# Altium PCB power-v2.2.PcbDoc (part 2 of 2)
Units mil, origin at the board's own origin, x right, y up, seen from the top; angles counter-clockwise.
Board outline 6000 x 4000 mil, 2 copper layers (Top Layer, Bottom Layer); 125 components, 68 nets, 351 pads, 6 vias.
Unrouted connection lines stored in the file: 252.
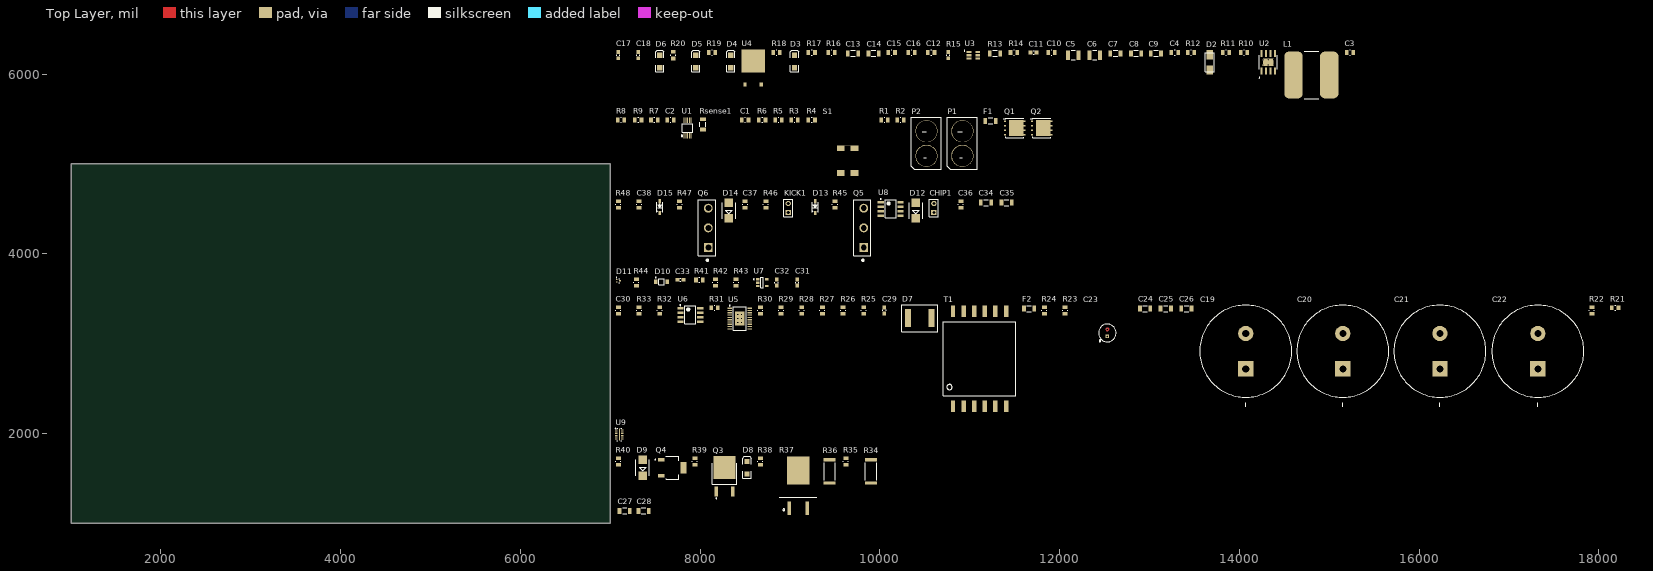
[diagram p0: Top Layer view]

## Part data (continued)
U5: "Controller to 20-Pin TSSOP EP", Case/Package=TSSOP, Manufacturer="Analog Devices / Linear Technology", Max Input Voltage=24V, Max Operating Temperature=125°C, Min Operating Temperature=-40°C, Min Supply Voltage=4.75V, Operating Supply Current=5.5mA, Output Current=150mA, Output Voltage=500V, Package Quantity=74, Category="Voltage Regulators - Switching", ComponentLink1Description=https://datasheet.ciiva.com/15104/getdatasheetpartid-472813-15104438.pdf?src-supplier=Verical, ComponentLink1URL=https://datasheet.ciiva.com/15104/getdatasheetpartid-472813-15104438.pdf?src-supplier=Verical, ComponentLink2Description=https://datasheet.ciiva.com/31429/1692507-31429494.pdf?src-supplier=Farnell, ComponentLink2URL=https://datasheet.ciiva.com/31429/1692507-31429494.pdf?src-supplier=Farnell, ComponentLink3Description=https://datasheet.ciiva.com/1964/27024-1964843.pdf?src-supplier=Digi-Key, ComponentLink3URL=https://datasheet.ciiva.com/1964/27024-1964843.pdf?src-supplier=Digi-Key, Manufacturer Part Number=LT3751EFE#PBF, Max Supply Voltage=24V, Number of Outputs=1, Number of Pins=20, Packaging=Rail/Tube, Pricing 1="1=9.26000, 25=6.14640, 100=5.08200, 250=4.82792, 500=4.71900 (USD)", Radiation Hardening=No, REACH SVHC="No SVHC", RoHS=Yes, Stock 1=1231, Supplier 1=Digi-Key, Termination=SMD/SMT
U6: "N-Channel 150V 4.1A (Ta) 2.5W (Ta) Surface Mount 8-SOIC", Package=8-SOIC, Rating=150V, Supplier Part Number 1=FDS2582CT-ND, Digikey=FDS2582CT-ND, Digikey Link=https://www.digikey.com/product-detail/en/on-semiconductor/FDS2582/FDS2582CT-ND/3025307, MF="ON Semiconductor", MP=FDS2582, Price="0.98 CAD", Supplier 1=Digi-Key
U7: library part CMP-06302-000001-1, "IC OPAMP GP 1 CIRCUIT SOT23-5", Input Bias Current=0.0000005uA, Input Offset Voltage=1mV, Manufacturer=Microchip, Max Junction Temp=+85°C, Max Supply Voltage=10V, Min Supply Voltage=2.2V, Nominal Supply Current=0.7-1.5mA, Package=SOT23-5LD-PL-1, Temperature="-40°C to +85°C", Temperature Range Low=-40°C, Voltage Gain=300-340V/mV, Automotive=No, Category=IC, ComponentLink2Description=Datasheet, ComponentLink2URL=http://www.microchip.com/mymicrochip/filehandler.aspx?ddocname=en580613, Device Class L1="Integrated Circuits (ICs)", Device Class L2="Linear ICs", Device Class L3="Amplifiers - Op Amps", Digikey Description="IC OPAMP GP 1 CIRCUIT SOT23-5", Footprint Url=https://ww1.microchip.com/downloads/en/PackagingSpec/00000049CH.pdf, Gain Bandwidth=0.55MHz, Height=1.45mm, Lead Free=Yes, Manufacturer Part Number=MIC7300YM5-TR, Mouser Description="Operational Amplifiers - Op Amps", Number Of Channels=1, Octopart=https://octopart.com/mic7300ym5-tr-microchip-66803593, RoHS=TRUE, Standoff Height=0mm, Temperature Range High=+85°C
U8: "Low-Side Gate Driver IC Non-Inverting 8-SOIC", Package="SOIC-8 Infineon", Supplier Part Number 1=IR4427SPBFCT-ND, Availability=Unavailable, MF="Infineon Technologies", MP=IR4427STRPBF, Price=None, SnapEDA_Link=https://www.snapeda.com/parts/IR4427STRPBF/Infineon%20Technologies/view-part/1815787/?ref=snap, Supplier 1=Digi-Key
U9: library part "EMI FILTER TPD6F002DSVR", "6-Channel EMI Filter for Display Interface", Manufacturer="Texas Instruments", PACKAGE_DESIGNATOR=DSV, Copyright="Copyright (C) 2018 Accelerated Designs. All rights reserved", Datasheet_URL=http://www.ti.com/lit/gpn/TPD6F002, FAMILY_NAME="EMI Solution", GENERIC_PART_NUMBER=TPD6F002, INDUSTRY_STD_PKG_TYPE=SON, Manufacturer_Part_Number=TPD6F002DSVR, PIN_COUNT=12, RefDes=RefDes, Type=DEV, Vendor="Texas Instruments"
Q3: MFG=STMicroelectronics, Supplier=Digikey, Supplier PN=497-16925-1-ND

## Via types
v1: diameter 19.68, hole 7.87, Top Layer to Bottom Layer, 6 vias

## Nets (pads, with @x,y where several pads share a name; then routed paths per layer and width w, separated by ;. In a path a pad name is that pad's centre, name@x,y a point inside that pad or via, vN(x,y) a via of type N, cw(c..) or ccw(c..) an arc to the next point about the centre after c; other vN are vias at no path point)
3V3: C2.2 C18.1 C31.2 C32.1 R3.1 R4.1 R6.1 R17.1 U1.6 U4.2 U7.5
5V: C15.2 C16.2 C17.1 R15.1 R18.1 U4.3
5V_VFB: R15.2 R16.2 U3.4
12V: C7.2 C8.2 C9.2 C13.2 C14.2 C34.1 C35.1 C36.2 L1.2 R11.2 R19.1 R21.2 R22.2 R27.2 R28.2 U3.3 U3.5 U5.13 U5.14 U8.6
12V_EN: R10.2 R13.1 U2.3
12V_VSENSE: R11.1 R14.2 U2.5
+HV: C19.POS C20.POS C21.POS C22.POS CHIP1.1 D7.OUT D12.C D14.C KICK1.1 R34.2 R35.2 R37.2 R41.2
+VBAT: F1.1 P1.2
A0_SEL: R9.1 U1.2
A1_SEL: R8.1 U1.1
CHIP_GATE: R45.2 R46.1 U8.7
GND: C2.1 C4.1 C5.1 C6.1 C7.1 C8.1 C9.1 C10.1 C11.1 C13.1 C14.1 C15.1 C16.1 C17.2 C18.2 C19.NEG C20.NEG C21.NEG C22.NEG C23.NEG C24.1 C25.1 C26.1 C27.1 C28.1 C30.2 C31.1 C32.2 C33.1 C34.2 C35.2 C36.1 C37.1 C38.1 D2.A D9.A D10.2 D11.3 D13.A D15.A P2.1 Q3.3 Q4.3 Q5.3 R8.2 R9.2 R13.2 R14.1 R16.1 R29.1 R32.2 R33.2 R40.1 R44.2 R46.2 R48.2 S1.0 T1.1 U1.7 U2.7 U2.9 U2.V1 U2.V2 U2.V3 U2.V4 U2.V5 U2.V6 U3.1 U4.1 U5.9 U5.10 U5.11 U5.21 U7.2 U8.3 U9.13
  other v1: 8418.35,3236.69 8461.65,3236.69 8418.35,3280 8461.65,3280 8418.35,3323.31 8461.65,3323.31
KICK_GATE: R47.2 R48.1 U8.5
NetC1_1: C1.1 R7.1 U1.10
NetC1_2: C1.2 R5.1 U1.9
NetC3_1: C3.1 U2.1
NetC3_2: C3.2 D2.C L1.1 U2.8
NetC4_2: C4.2 U2.4
NetC10_2: C10.2 R12.1 U2.6
NetC11_2: C11.2 R12.2
NetC12_1: C12.1 U3.6
NetC12_2: C12.2 U3.2
NetC29_1: C29.1 R26.1
NetC29_2: C29.2 F2.2 R25.1 T1.7 T1.8 T1.9 T1.10
NetC33_2: C33.2 D11.1 R43.1 U7.3
NetC37_2: C37.2 D13.C Q5.1 R45.1
NetC38_2: C38.2 D15.C Q6.1 R47.1
NetCHIP1_2: CHIP1.2 D12.A Q5.2
NetD1_A: Q1.G Q2.G R1.1
NetD1_C: Q1.S Q2.S R2.1
NetD3_1: D3.1 R17.2
NetD3_2: D3.2 D4.2 D5.2 D6.2
NetD4_1: D4.1 R18.2
NetD5_1: D5.1 R19.2
NetD6_1: D6.1 R20.2
NetD7_IN: D7.IN T1.12
NetD8_1: D8.1 R36.1
NetD8_2: D8.2 Q3.2 R37.1
NetD9_C: D9.C Q3.1 Q4.2 R38.1
NetD10_1: D10.1 D11.2 U7.1 U7.4
NetD14_A: D14.A KICK1.2 Q6.2
NetF1_2: F1.2 Q1.D
NetP1_1: P1.1 P2.2
NetQ4_G: Q4.1 R39.1 R40.2
NetR1_2: R1.2 R2.2 S1.1
NetR3_2: R3.2 U1.5 U9.2
NetR4_2: R4.2 U1.4 U9.3
NetR6_2: R6.2 U1.3 U9.1
NetR25_2: R25.2 U5.1
NetR26_2: R26.2 R30.1 R31.1 T1.3 T1.4 T1.5 T1.6 U6.D
NetR27_1: R27.1 U5.6 U9.5
NetR28_1: R28.1 U9.4
NetR30_2: R30.2 U5.20
NetR31_2: R31.2 U5.18
NetR32_1: R32.1 U5.12 U6.S
NetR33_1: R33.1 U5.16
NetR34_1: R34.1 R36.2
NetR35_1: R35.1 R38.2
NetU5_8: U5.8 U9.6
NetU5_15: U5.15 U6.G
NetU8_2: U8.2
NetU8_4: U8.4
OVLO1: R24.1 U5.3
OVLO2: R22.1 U5.5
UVLO1: R23.1 U5.2
UVLO2: R21.1 U5.4
VCC: C5.2 C6.2 C23.POS C25.2 C26.2 C27.2 C28.2 F2.1 R5.2 R10.1 R20.1 R23.2 R24.2 R39.2 Rsense1.1 U2.2
VCC_RPP: Q2.D R7.2 Rsense1.2 U1.8
pads on no net: C24.2 C30.1 Q1.9 Q2.9 Q6.3 R29.2 R37.3 R41.1 R42.1 R42.2 R43.2 R44.1 T1.2 T1.11 U5.7 U5.17 U5.19 U8.1 U8.8 U9.7 U9.8 U9.9 U9.10 U9.11 U9.12